# EAGLE board Schema v8 (EAGLE 9.7.0)
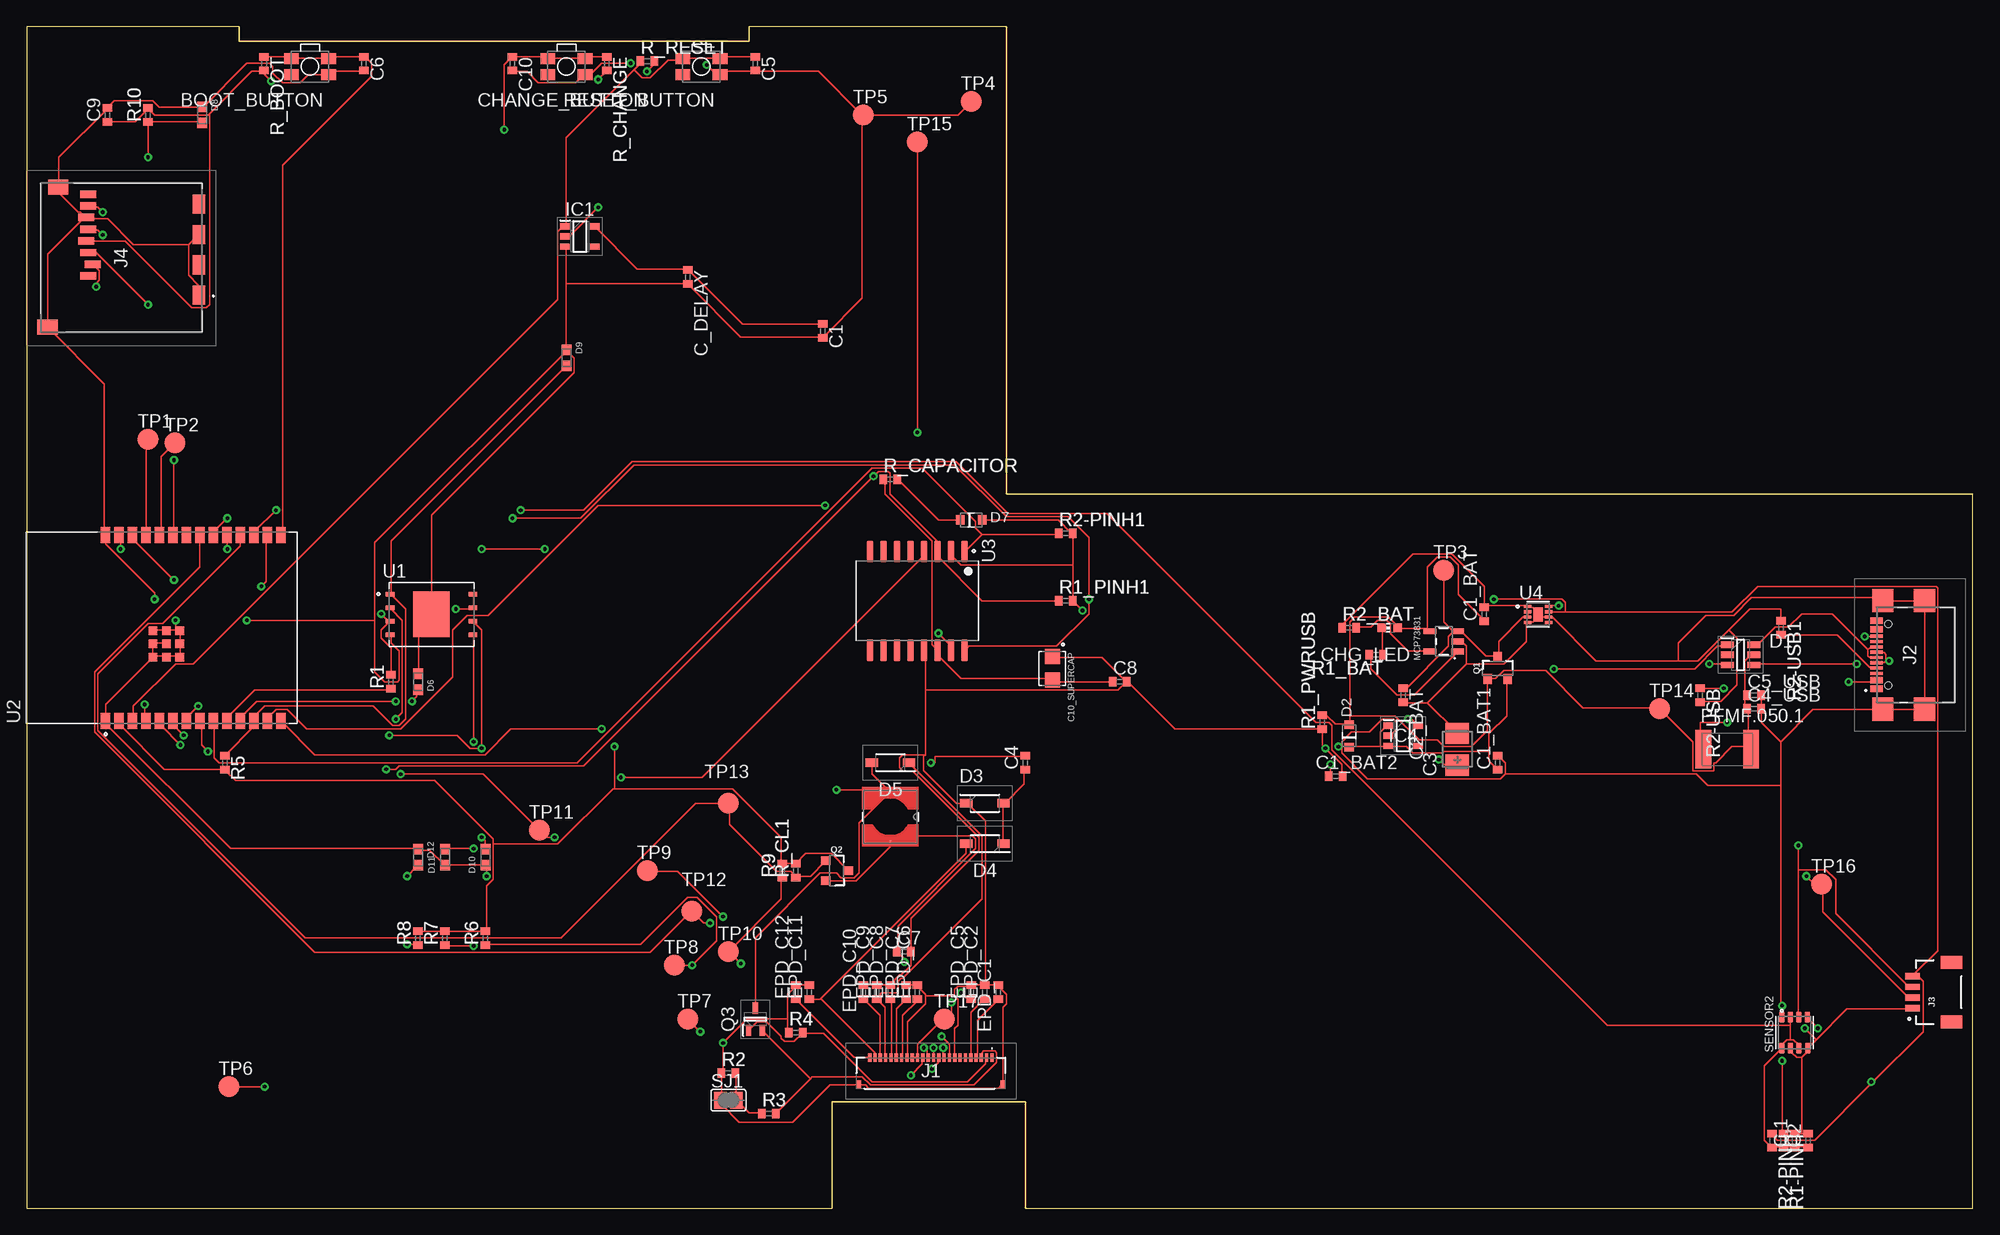
[diagram p0: board, top side]
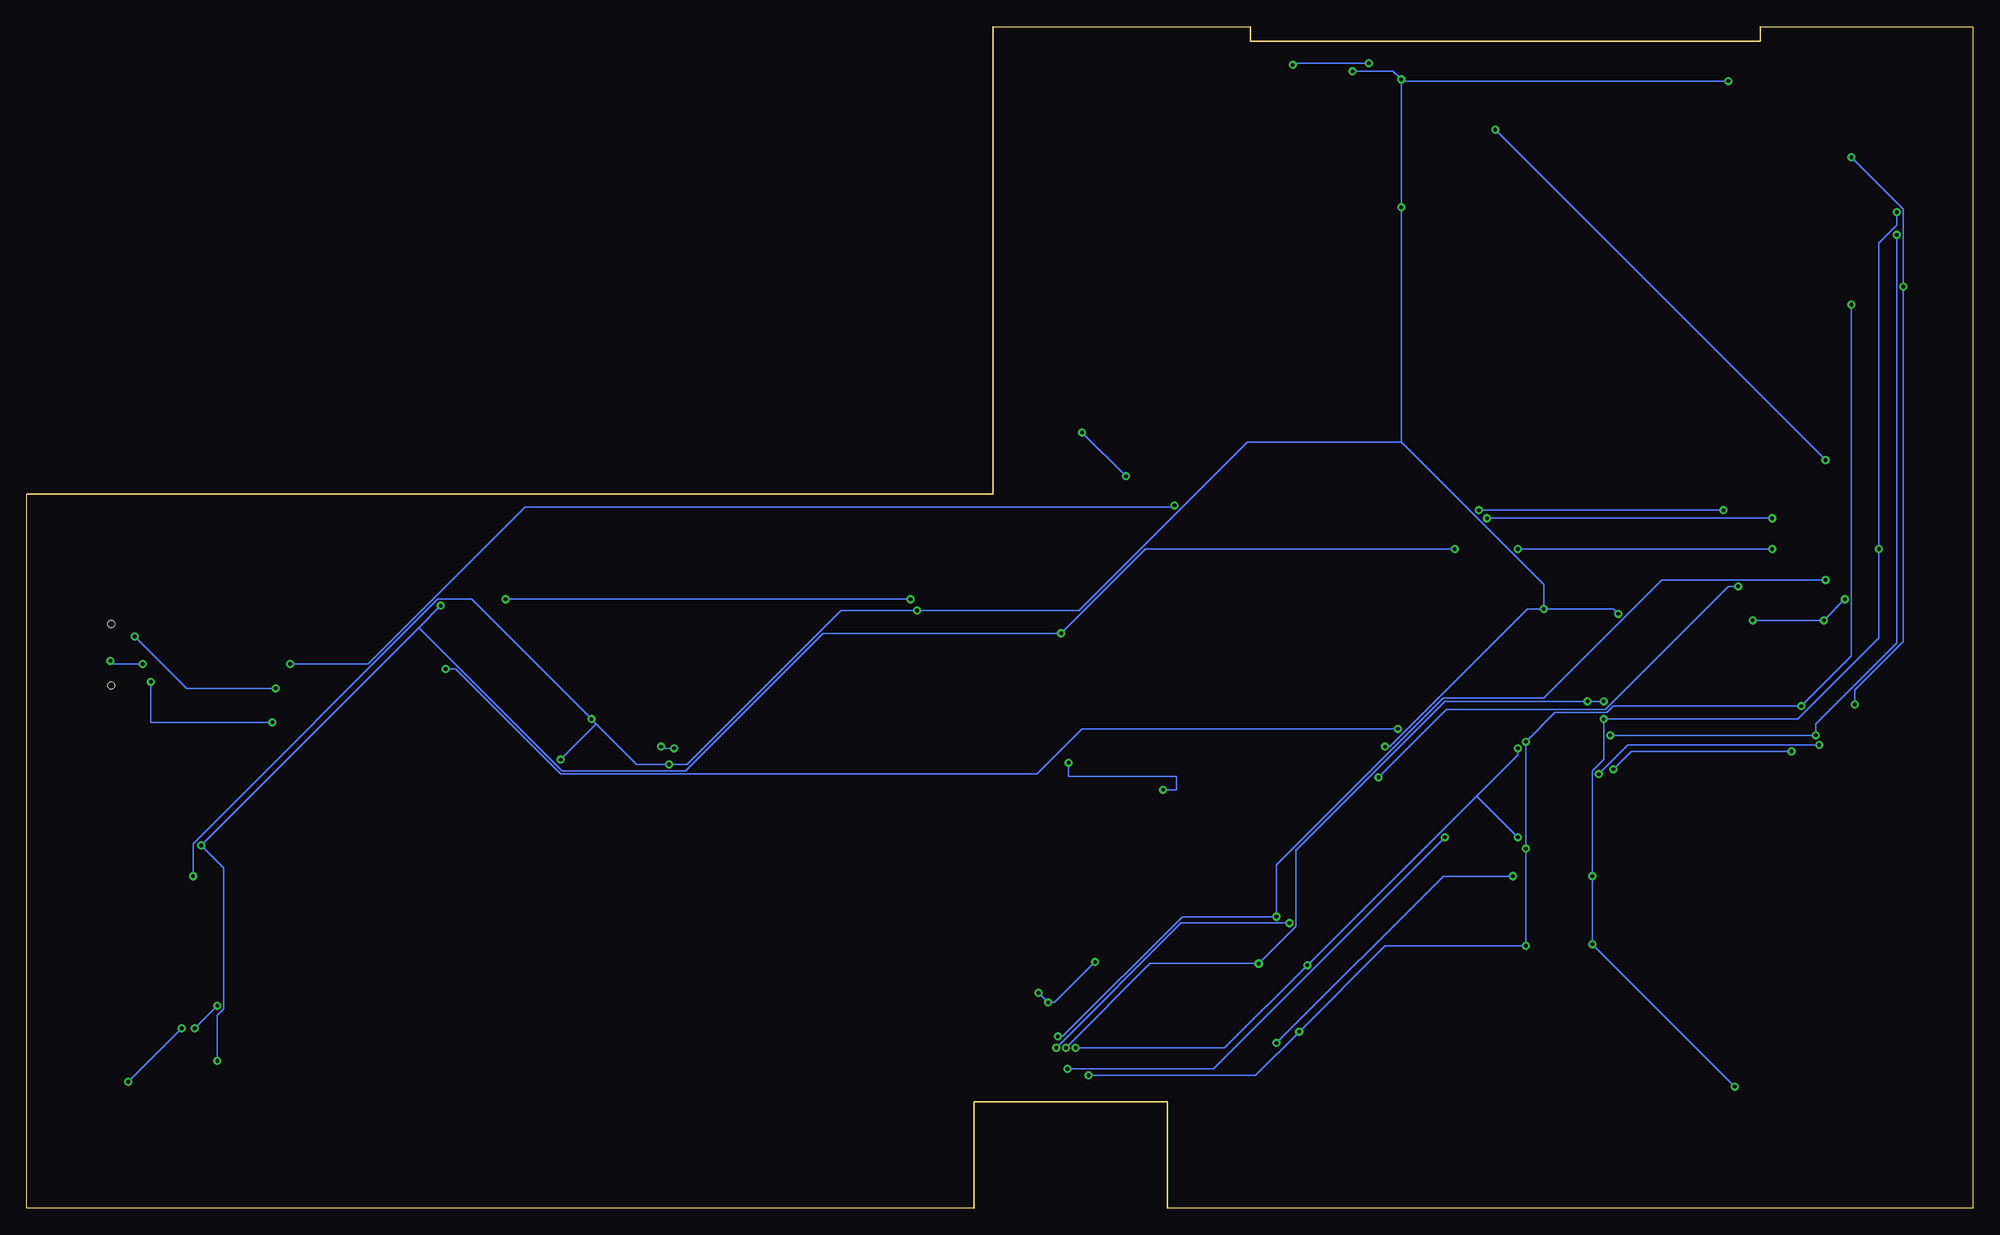
[diagram p1: board, bottom side, seen from below]

Size 183.15 x 111.2 mm. Coordinates in mm from the lower left corner, seen from the top.
Outline: 0,0 75.78,0 75.78,10 93.98,10 93.98,0 183.15,0 183.15,67.2 92.2,67.2 92.2,111.2 68,111.2 68,109.8 20,109.8 20,111.2 0,111.2 0,0
Copper layers (1*16): Top 0.035mm / dielectric 1.5mm / Bottom 0.035mm
Design rules "Fusion Electronics Design Rules": minimum track width 6mil, minimum drill 0.35mm, track to track 6mil, track to pad 6mil, pad to pad 6mil, via to via 6mil, smd to smd 6mil, copper to edge 40mil, drill to drill 6mil, minimum pad ring 10mil, minimum via ring 8mil, stop-mask expansion 4mil, vias tented up to drill 0mil, thermal gap 10mil

## Footprints (pad centres in the part's own frame; a part is rotated, then mirrored left to right if it is on the bottom)
MYBUTTON = smd 1.4 x 1.05: 1 1.75,0.75; 2 -1.75,0.75; 3 -1.75,-0.75; 4 1.75,-0.75
ESP32_WROVER_EAGLE-LTSPICE_C0402 = smd 0.7 x 0.9: 1 -0.65,0; 2 0.65,0
RCL_CT3528 = smd 2 x 2.2: + -1.5,0; - 1.5,0
CAPCP3225X100N = smd 1.4 x 1.4: 1 -1.1,0; 2 1.1,0
ADAFRUIT_CHIP-LED0603 = smd 0.8 x 0.8: A 0,-0.75; C 0,0.75
SOT95P280X145-6N = smd 1.2 x 0.6: 1 -1.25,0.95; 2 -1.25,0; 3 -1.25,-0.95; 4 1.25,-0.95; 5 1.25,0; 6 1.25,0.95
ESP32_WROVER_AVX---SD0805S020S1R0_AVX_SD0805S020S1R0_0 = smd 0.8 x 0.9: 1 -1.05,0; 2 1.05,0
SOD3716X135N = smd 1.15 x 0.8: 1 -1.75,0; 2 1.75,0
DIOC1608X36N = smd 0.97 x 0.94: 1 -0.75,0; 2 0.75,0
SOT95P280X125-5N = smd 0.9 x 0.6: 1 -1.4,0.95; 2 -1.4,0; 3 -1.4,-0.95; 4 1.4,-0.95; 5 1.4,0.95
SOT95P280X120-5N = smd 0.9 x 0.6: 1 -1.4,0.95; 2 -1.4,0; 3 -1.4,-0.95; 4 1.4,-0.95; 5 1.4,0.95
FH34SRJ24S05SH99 = smd 0.3 x 0.8: 1 5.75,1.45; 2 5.25,1.45; 3 4.75,1.45; 4 4.25,1.45; 5 3.75,1.45; 6 3.25,1.45; 7 2.75,1.45; 8 2.25,1.45; 9 1.75,1.45; 10 1.25,1.45; 11 0.75,1.45; 12 0.25,1.45; 13 -0.25,1.45; 14 -0.75,1.45; 15 -1.25,1.45; 16 -1.75,1.45; 17 -2.25,1.45; 18 -2.75,1.45; 19 -3.25,1.45; 20 -3.75,1.45; 21 -4.25,1.45; 22 -4.75,1.45; 23 -5.25,1.45; 24 -5.75,1.45 | smd 0.4 x 0.8: MP1 6.75,-1.05; MP2 -6.75,-1.05
SAMACSYS_PARTS_USB4110GFA = smd 0.3 x 1.15: A1 -3.35,3.678; A4 -2.55,3.678; A5 -1.25,3.678; A6 -0.25,3.678; A7 0.25,3.678; A8 1.25,3.678; A9 2.55,3.678; A12 3.35,3.678; B1 3.05,3.678; B4 2.25,3.678; B5 1.75,3.678; B6 0.75,3.678; B7 -0.75,3.678; B8 -1.75,3.678; B9 -2.25,3.678; B12 -3.05,3.678 | smd 2.18 x 2: MP1 -5.11,-0.827; MP2 5.11,-0.827; MP3 -5.11,3.103; MP4 5.11,3.103 | hole 0.65: -2.89,2.603; 2.89,2.603
JST04_1MM_RA = smd 0.6 x 1.35: 1 -1.5,0; 2 -0.5,0; 3 0.5,0; 4 1.5,0 | smd 1.2 x 2: NC1 2.8,-3.675; NC2 -2.8,-3.675
112ATAARR03ATTEND = smd 1.8 x 1.2: G1 10.6,10.4; G2 4.9,10.4; S1 7.75,10.4; S2 2.05,10.4 | smd 1.4 x 1.9: G3 13.6,-3.85; G4 0.45,-2.85 | smd 0.7 x 1.5: P1 8.8,0; P2 7.7,0.4; P3 6.6,0; P4 5.5,-0.2; P5 4.4,0; P6 3.3,-0.2; P7 2.2,0; P8 1.1,0
IND_4828-WE-TPC_WRE = smd 0.127 x 0.127: 1 -2.286,0; 2 2.286,0
ESP32_WROVER_SPARKFUN-IC-POWER_SOT23-5 = smd 0.55 x 1.2: 1 -0.95,-1.3; 2 0,-1.3; 3 0.95,-1.3; 4 0.95,1.3; 5 -0.95,1.3
ESP32C6_VARISTOR_CT/CN1812 = smd 1.5 x 3.6: 1 -2.25,0; 2 2.25,0
ESP32_WROVER_SPARKFUN-DISCRETESEMI_SOT23-3 = smd 0.8 x 0.9: 1 -0.95,-1; 2 0.95,-1; 3 0,1.1
SOT65P210X110-3N = smd 1.05 x 0.5: 1 -1.05,0.65; 2 -1.05,-0.65; 3 1.05,0
ESP32_WROVER_EAGLE-LTSPICE_R0402 = smd 0.7 x 0.9: 1 -0.65,0; 2 0.65,0
ESP32_WROVER_BME680_PSON80P300X300X100-8N = smd 1.016 x 0.5: 1 1.458,1.2; 2 1.458,0.4; 3 1.458,-0.4; 4 1.458,-1.2; 5 -1.458,-1.22; 6 -1.458,-0.4; 7 -1.458,0.4; 8 -1.458,1.2
SJ = smd 1.168 x 1.6: 1 -0.762,0; 2 0.762,0
TP20R = smd 2 x 2: TP 0,0
SON127P600X800X80-9N = smd 0.94 x 0.44: 1 -3.895,1.905; 2 -3.895,0.635; 3 -3.895,-0.635; 4 -3.895,-1.905; 5 3.895,-1.905; 6 3.895,-0.635; 7 3.895,0.635; 8 3.895,1.905 | smd 3.4 x 4.3: 9 0,0
XCVR_ESP32-C6-WROOM-1-N8 = smd 1.5 x 0.9: 1 -8.75,5.26; 2 -8.75,3.99; 3 -8.75,2.72; 4 -8.75,1.45; 5 -8.75,0.18; 6 -8.75,-1.09; 7 -8.75,-2.36; 8 -8.75,-3.63; 9 -8.75,-4.9; 10 -8.75,-6.17; 11 -8.75,-7.44; 12 -8.75,-8.71; 13 -8.75,-9.98; 14 -8.75,-11.25; 15 8.75,-11.25; 16 8.75,-9.98; 17 8.75,-8.71; 18 8.75,-7.44; 19 8.75,-6.17; 20 8.75,-4.9; 21 8.75,-3.63; 22 8.75,-2.36; 23 8.75,-1.09; 24 8.75,0.18; 25 8.75,1.45; 26 8.75,2.72; 27 8.75,3.99; 28 8.75,5.26 | smd 0.8 x 0.8: 29_1 -2.755,0.79; 29_2 -1.505,0.79; 29_3 -0.255,0.79; 29_4 -2.755,-0.46; 29_5 -1.505,-0.46; 29_6 -0.255,-0.46; 29_7 -2.755,-1.71; 29_8 -1.505,-1.71; 29_9 -0.255,-1.71
SOIC127P1032X265-16N = smd 2.05 x 0.59: 1 -4.655,4.445; 2 -4.655,3.175; 3 -4.655,1.905; 4 -4.655,0.635; 5 -4.655,-0.635; 6 -4.655,-1.905; 7 -4.655,-3.175; 8 -4.655,-4.445; 9 4.655,-4.445; 10 4.655,-3.175; 11 4.655,-1.905; 12 4.655,-0.635; 13 4.655,0.635; 14 4.655,1.905; 15 4.655,3.175; 16 4.655,4.445
SON50P200X200X80-9N = smd 0.76 x 0.27: 1 -0.985,0.75; 2 -0.985,0.25; 3 -0.985,-0.25; 4 -0.985,-0.75; 5 0.985,-0.75; 6 0.985,-0.25; 7 0.985,0.25; 8 0.985,0.75 | smd 0.9 x 1.3: 9 0,0

## Placement (x,y rotation side)
BOOT_BUTTON  BUTTON_CUSYOMV1  [MYBUTTON]  26.67,107.43 180 top
C1  [ESP32_WROVER_EAGLE-LTSPICE_C0402]  74.93,82.55 270 top
C1_BAT  4.7uF  [ESP32_WROVER_EAGLE-LTSPICE_C0402]  137.16,55.88 90 top
C1_BAT1  4.7uF  [ESP32_WROVER_EAGLE-LTSPICE_C0402]  138.43,41.91 90 top
C1_BAT2  4.7uF  [ESP32_WROVER_EAGLE-LTSPICE_C0402]  123.19,40.64 0 top
C2  100nF  [ESP32_WROVER_EAGLE-LTSPICE_C0402]  167.64,6.35 90 top
C2_BAT  4.7uF  [ESP32_WROVER_EAGLE-LTSPICE_C0402]  129.54,48.26 270 top
C3  100uF TANT  [RCL_CT3528]  134.62,43.18 90 top
C4  4.7uF/25V  [ESP32_WROVER_EAGLE-LTSPICE_C0402]  93.98,41.91 90 top
C4_USB  100nF  [ESP32_WROVER_EAGLE-LTSPICE_C0402]  162.56,46.99 0 top
C5  1uF  [ESP32_WROVER_EAGLE-LTSPICE_C0402]  68.58,107.71 270 top
C5_USB  4.7uF  [ESP32_WROVER_EAGLE-LTSPICE_C0402]  162.56,48.26 0 top
C6  100nF  [ESP32_WROVER_EAGLE-LTSPICE_C0402]  31.75,107.71 270 top
C7  10uF  [ESP32_WROVER_EAGLE-LTSPICE_C0402]  82.55,24.13 0 top
C8  100nF  [ESP32_WROVER_EAGLE-LTSPICE_C0402]  102.87,49.53 0 top
C9  100nF  [ESP32_WROVER_EAGLE-LTSPICE_C0402]  7.62,102.87 90 top
C10  100nF  [ESP32_WROVER_EAGLE-LTSPICE_C0402]  45.72,107.71 270 top
C10_SUPERCAP  CPH3225A  [CAPCP3225X100N]  96.52,50.8 270 top
C.1  100nF  [ESP32_WROVER_EAGLE-LTSPICE_C0402]  166.37,6.35 90 top
C_DELAY  100nF  [ESP32_WROVER_EAGLE-LTSPICE_C0402]  62.23,87.63 270 top
CHANGE_BUTTON  BUTTON_CUSYOMV1  [MYBUTTON]  50.8,107.43 180 top
CHG_LED  [ADAFRUIT_CHIP-LED0603]  128.27,54.61 90 top
D1  USBLC6-2SC6Y  [SOT95P280X145-6N]  161.29,52.07 0 top
D2  ESP32_WROVER_AVX---SD0805S020S1R0_AVX_SD0805S020S1R0_0_0AVX_SD0805S020S1R0_0_0  [ESP32_WROVER_AVX---SD0805S020S1R0_AVX_SD0805S020S1R0_0]  124.46,44.45 90 top
D3  MBR0530  [SOD3716X135N]  90.17,38.1 0 top
D4  MBR0530  [SOD3716X135N]  90.17,34.29 180 top
D5  MBR0530  [SOD3716X135N]  81.28,41.91 180 top
D6  PGB1010603MR  [DIOC1608X36N]  36.83,49.53 270 top
D7  ESP32_WROVER_AVX---SD0805S020S1R0_AVX_SD0805S020S1R0_0_0AVX_SD0805S020S1R0_0_0  [ESP32_WROVER_AVX---SD0805S020S1R0_AVX_SD0805S020S1R0_0]  88.9,64.77 0 top
D8  PGB1010603MR  [DIOC1608X36N]  16.51,102.87 270 top
D9  PGB1010603MR  [DIOC1608X36N]  50.8,80.01 270 top
D10  PGB1010603MR  [DIOC1608X36N]  43.18,33.02 90 top
D11  PGB1010603MR  [DIOC1608X36N]  39.37,33.02 90 top
D12  PGB1010603MR  [DIOC1608X36N]  36.83,33.02 270 top
EPD_C1  1uF/50V  [ESP32_WROVER_EAGLE-LTSPICE_C0402]  91.44,20.32 90 top
EPD_C2  1uF/50V  [ESP32_WROVER_EAGLE-LTSPICE_C0402]  90.17,20.32 90 top
EPD_C5  0.1uF/50V  [ESP32_WROVER_EAGLE-LTSPICE_C0402]  88.9,20.32 90 top
EPD_C6  1uF/50V  [ESP32_WROVER_EAGLE-LTSPICE_C0402]  83.82,20.32 90 top
EPD_C7  1uF/50V  [ESP32_WROVER_EAGLE-LTSPICE_C0402]  82.77,20.32 90 top
EPD_C8  1uF/50V  [ESP32_WROVER_EAGLE-LTSPICE_C0402]  81.28,20.32 90 top
EPD_C9  1uF/50V  [ESP32_WROVER_EAGLE-LTSPICE_C0402]  80.01,20.32 90 top
EPD_C10  1uF/50V  [ESP32_WROVER_EAGLE-LTSPICE_C0402]  78.74,20.32 90 top
EPD_C11  1uF/50V  [ESP32_WROVER_EAGLE-LTSPICE_C0402]  73.66,20.32 90 top
EPD_C12  1uF/50V  [ESP32_WROVER_EAGLE-LTSPICE_C0402]  72.39,20.32 90 top
IC1  BD5229G-TR  [SOT95P280X125-5N]  52.07,91.44 0 top
IC4  XC6220A331MR-G  [SOT95P280X120-5N]  129.54,44.45 0 top
J1  FH34SRJ-24S-0.5SH_99_  [FH34SRJ24S05SH99]  85.09,12.7 0 top
J2  SAMACSYS_PARTS_USB4110-GF-A  [SAMACSYS_PARTS_USB4110GFA]  177.77,52.07 90 top
J3  QWIIC_RIGHT_ANGLE  [JST04_1MM_RA]  177.46,20.32 90 top
J4  112A-TAAR-R03_ATTEND  [112ATAARR03ATTEND]  5.82,96.52 270 top
L1  744043680IND_4828-WE-TPC_WRE  [IND_4828-WE-TPC_WRE]  81.28,36.83 270 top
MCP73831  ESP32_WROVER_SPARKFUN-IC-POWER_MCP73831  [ESP32_WROVER_SPARKFUN-IC-POWER_SOT23-5]  133.35,53.34 90 top
PFMF.050.1  ESP32C6_VARISTORCN1812  [ESP32C6_VARISTOR_CT/CN1812]  160.02,43.18 0 top
Q1  20V/4.2A/52mΩ/1.4W  [ESP32_WROVER_SPARKFUN-DISCRETESEMI_SOT23-3]  138.43,50.8 0 top
Q2  20V/4.2A/52mΩ/1.4W  [ESP32_WROVER_SPARKFUN-DISCRETESEMI_SOT23-3]  76.2,31.75 270 top
Q3  SI1308EDL-T1-GE3  [SOT65P210X110-3N]  68.58,17.78 90 top
R1  10K  [ESP32_WROVER_EAGLE-LTSPICE_R0402]  34.29,49.53 90 top
R1-PINH  10K  [ESP32_WROVER_EAGLE-LTSPICE_R0402]  165.32,6.35 270 top
R1_BAT  200  [ESP32_WROVER_EAGLE-LTSPICE_R0402]  127,52.07 180 top
R1_PINH1  10K  [ESP32_WROVER_EAGLE-LTSPICE_R0402]  97.79,57.15 0 top
R1_PWRUSB  100K  [ESP32_WROVER_EAGLE-LTSPICE_R0402]  121.92,45.72 90 top
R2  2.2  [ESP32_WROVER_EAGLE-LTSPICE_R0402]  66.04,12.7 0 top
R2-PINH  10K  [ESP32_WROVER_EAGLE-LTSPICE_R0402]  164.27,6.35 270 top
R2-PINH1  10K  [ESP32_WROVER_EAGLE-LTSPICE_R0402]  97.79,63.5 0 top
R2-USB  5k1  [ESP32_WROVER_EAGLE-LTSPICE_R0402]  157.48,48.26 270 top
R2-USB1  5k1  [ESP32_WROVER_EAGLE-LTSPICE_R0402]  165.1,54.61 270 top
R2_BAT  2K  [ESP32_WROVER_EAGLE-LTSPICE_R0402]  124.46,54.61 0 top
R3  [ESP32_WROVER_EAGLE-LTSPICE_R0402]  69.85,8.89 0 top
R4  10K  [ESP32_WROVER_EAGLE-LTSPICE_R0402]  72.39,16.51 0 top
R5  10K  [ESP32_WROVER_EAGLE-LTSPICE_R0402]  18.66,41.91 270 top
R6  10K  [ESP32_WROVER_EAGLE-LTSPICE_R0402]  43.18,25.4 90 top
R7  10K  [ESP32_WROVER_EAGLE-LTSPICE_R0402]  39.37,25.4 90 top
R8  10K  [ESP32_WROVER_EAGLE-LTSPICE_R0402]  36.83,25.4 90 top
R9  10K  [ESP32_WROVER_EAGLE-LTSPICE_R0402]  71.12,31.75 90 top
R10  10K  [ESP32_WROVER_EAGLE-LTSPICE_R0402]  11.43,102.87 90 top
R_BOOT  10K  [ESP32_WROVER_EAGLE-LTSPICE_R0402]  22.35,107.71 270 top
R_CAPACITOR  15  [ESP32_WROVER_EAGLE-LTSPICE_R0402]  81.28,68.58 0 top
R_CHANGE  10K  [ESP32_WROVER_EAGLE-LTSPICE_R0402]  54.61,107.71 270 top
R_CL1  10K  [ESP32_WROVER_EAGLE-LTSPICE_R0402]  72.39,31.75 90 top
R_RESET  10K  [ESP32_WROVER_EAGLE-LTSPICE_R0402]  58.42,107.95 0 top
RESET_BUTTON  BUTTON_CUSYOMV1  [MYBUTTON]  63.5,107.43 180 top
SENSOR2  ESP32_WROVER_BME680_BME680  [ESP32_WROVER_BME680_PSON80P300X300X100-8N]  166.37,16.51 90 top
SJ1  [SJ]  66.04,10.16 0 top
TP1  TPTP20R  [TP20R]  11.43,72.35 0 top
TP2  TPTP20R  [TP20R]  13.97,72 0 top
TP3  TPTP20R  [TP20R]  133.35,60.03 0 top
TP4  TPTP20R  [TP20R]  88.9,104.14 0 top
TP5  TPTP20R  [TP20R]  78.74,102.87 0 top
TP6  TPTP20R  [TP20R]  19.05,11.43 0 top
TP7  TPTP20R  [TP20R]  62.23,17.78 0 top
TP8  TPTP20R  [TP20R]  60.96,22.86 0 top
TP9  TPTP20R  [TP20R]  58.42,31.75 0 top
TP10  TPTP20R  [TP20R]  66.04,24.13 0 top
TP11  TPTP20R  [TP20R]  48.26,35.56 0 top
TP12  TPTP20R  [TP20R]  62.62,27.94 0 top
TP13  TPTP20R  [TP20R]  66.04,38.1 0 top
TP14  TPTP20R  [TP20R]  153.67,46.99 0 top
TP15  TPTP20R  [TP20R]  83.82,100.33 0 top
TP16  TPTP20R  [TP20R]  168.91,30.48 0 top
TP17  TPTP20R  [TP20R]  86.36,17.78 0 top
U1  W25Q512JVEIQ  [SON127P600X800X80-9N]  38.1,55.88 0 top
U2  ESP32-C6-WROOM-1-N8  [XCVR_ESP32-C6-WROOM-1-N8]  12.7,54.61 90 top
U3  DS3231SN#  [SOIC127P1032X265-16N]  83.82,57.15 270 top
U4  MAX17048G+T10  [SON50P200X200X80-9N]  142.24,55.88 0 top

## Library data of the parts
BOOT_BUTTON CHANGE_BUTTON CHG_LED PFMF.050.1 RESET_BUTTON SJ1 TP1-TP17 = DeskAssistant v19 v1
C1 C1_BAT C1_BAT1 C1_BAT2 C2 C2_BAT C4 C4_USB C5 C5_USB C6-C10 C.1 C_DELAY EPD_C1 EPD_C2 EPD_C5-EPD_C12 = DeskAssistant v19 v1; SPICEMODEL: NONE; SPICEPREFIX: C
C3 = DeskAssistant v19 v1; SPICEPREFIX: C
C10_SUPERCAP = DeskAssistant v19 v1; AVAILABILITY: Not in stock; CHECK_PRICES: https://www.snapeda.com/parts/CPH3225A/Seiko+Instruments/view-part/?ref=eda; DESCRIPTION: 11 mF (EDLC) Supercapacitor 3.3 V 1210 (3225 Metric) - -; MF: Seiko Instruments; MP: CPH3225A; PACKAGE: 1210 Seiko; PRICE: None; PURCHASE-URL: https://www.snapeda.com/api/url_track_click_mouser/?unipart_id=562593&manufacturer=Seiko Instruments&part_name=CPH3225A&search_term=None; SNAPEDA_LINK: https://www.snapeda.com/parts/CPH3225A/Seiko+Instruments/view-part/?ref=snap
D1 = DeskAssistant v19 v1; AVAILABILITY: In Stock; CHECK_PRICES: https://www.snapeda.com/parts/USBLC6-2SC6Y/STMicroelectronics/view-part/?ref=eda; DESCRIPTION: 17V Clamp 5A (8/20µs) Ipp Tvs Diode Surface Mount SOT-23-6; MF: STMicroelectronics; MP: USBLC6-2SC6Y; PACKAGE: SOT-23-6 STMicroelectronics; PRICE: None; SNAPEDA_LINK: https://www.snapeda.com/parts/USBLC6-2SC6Y/STMicroelectronics/view-part/?ref=snap
D2 D7 = DeskAssistant v19 v1; CENTROID_NOT_SPECIFIED: No; DATASHEET: http://datasheets.avx.com/schottky.pdf; DIGIKEY_DESCRIPTION: DIODE SCHOTTKY 20V 1A 0805; DIGIKEY_PART_NUMBER: 478-7800-1-ND; LEAD_FREE: yes; MF: AVX; MOUSER_PART_NUMBER: 581-SD0805S020S1R0; PACKAGE: 0805 (2012 metric); PREFIX: D; ROHS: yes; TEMPERATURE_RANGE_HIGH: +125°C; TEMPERATURE_RANGE_LOW: -55°C
D3-D5 = DeskAssistant v19 v1; AVAILABILITY: In Stock; CHECK_PRICES: https://www.snapeda.com/parts/MBR0530/Onsemi/view-part/?ref=eda; DESCRIPTION: Diode Schottky 30 V 500mA Surface Mount SOD-123; MF: ON Semiconductor; MP: MBR0530; PACKAGE: SOD-123-2 ON Semiconductor; PRICE: None; PURCHASE-URL: https://www.snapeda.com/api/url_track_click_mouser/?unipart_id=179458&manufacturer=ON Semiconductor&part_name=MBR0530&search_term=None; SNAPEDA_LINK: https://www.snapeda.com/parts/MBR0530/Onsemi/view-part/?ref=snap
D6 D8-D12 = DeskAssistant v19 v1; AVAILABILITY: In Stock; CHECK_PRICES: https://www.snapeda.com/parts/PGB1010603MR/Littelfuse/view-part/?ref=eda; DESCRIPTION: 150V (Typ) Clamp - Ipp Tvs Diode Surface Mount 0603 (1608 Metric); MF: Littelfuse Inc.; MP: PGB1010603MR; PACKAGE: 0603 Littelfuse Inc.; PRICE: None; PURCHASE-URL: https://www.snapeda.com/api/url_track_click_mouser/?unipart_id=5659453&manufacturer=Littelfuse Inc.&part_name=PGB1010603MR&search_term=None; SNAPEDA_LINK: https://www.snapeda.com/parts/PGB1010603MR/Littelfuse/view-part/?ref=snap
IC1 = DeskAssistant v19 v1; DESCRIPTION: Voltage Detector with Adjustable Delay Time: CMOS processes are utilized to develop high precision, low current consumption CMOS reset ICs that allow arbitrary setting of the delay time. The extensive lineup includes both Nch Open Drain and CMOS output types in a wide range of detection voltages (from 2.3V to 6.0V, in 0.1V steps), enabling selection of the ideal solution based on customer requirements. In addition, the entire series is of course both lead-free and RoHS-compliant.; HEIGHT: 1.25mm; MANUFACTURER_NAME: ROHM Semiconductor; MANUFACTURER_PART_NUMBER: BD5229G-TR; MOUSER_PART_NUMBER: 755-BD5229G-TR; MOUSER_PRICE-STOCK: https://www.mouser.co.uk/ProductDetail/ROHM-Semiconductor/BD5229G-TR?qs=4kLU8WoGk0vvnhrrYwdszw%3D%3D
IC4 = DeskAssistant v19 v1; DESCRIPTION: LDO Voltage Regulators; HEIGHT: 1.2mm; MANUFACTURER_NAME: Torex; MANUFACTURER_PART_NUMBER: XC6220A331MR-G; MOUSER_PART_NUMBER: 865-XC6220A331MR-G; MOUSER_PRICE-STOCK: https://www.mouser.co.uk/ProductDetail/Torex-Semiconductor/XC6220A331MR-G?qs=AsjdqWjXhJ8ZSWznL1J0gg%3D%3D
J1 = DeskAssistant v19 v1; DESCRIPTION: 24 Position FFC, FPC Connector Contacts, Top and Bottom 0.020" (0.50mm) Surface Mount, Right Angle; HEIGHT: 1.1mm; MANUFACTURER_NAME: Hirose; MANUFACTURER_PART_NUMBER: FH34SRJ-24S-0.5SH(99); MOUSER_PART_NUMBER: 798-FH34SRJ24S05SH99; MOUSER_PRICE-STOCK: https://www.mouser.co.uk/ProductDetail/Hirose-Connector/FH34SRJ-24S-0.5SH99?qs=vcbW%252B4%252BSTIpKBl5ap9J8Fw%3D%3D
J2 = DeskAssistant v19 v1; DESCRIPTION: CONN USB 2.0 TYPE-C R/A SMT; HEIGHT: 3.26mm; MANUFACTURER_NAME: GCT (GLOBAL CONNECTOR TECHNOLOGY); MANUFACTURER_PART_NUMBER: USB4110-GF-A; MOUSER_PART_NUMBER: 640-USB4110-GF-A; MOUSER_PRICE-STOCK: https://www.mouser.co.uk/ProductDetail/GCT/USB4110-GF-A?qs=KUoIvG%2F9IlYiZvIXQjyJeA%3D%3D
J3 = DeskAssistant v19 v1; PROD_ID: CONN-13694
J4 = DeskAssistant v19 v1; DESCRIPTION: Micro SD Card Socket, Push-Push Type, Top Mount, SMT, H=1.83mm, 10u; HEIGHT: 1.9mm; MANUFACTURER_NAME: ATTEND; MANUFACTURER_PART_NUMBER: 112A-TAAR-R03 ATTEND
L1 = DeskAssistant v19 v1; COPYRIGHT: Copyright (C) 2024 Ultra Librarian. All rights reserved.; MANUFACTURER_PART_NUMBER: 744043680; MFR_NAME: Wurth Electronics
MCP73831 = DeskAssistant v19 v1; PROD_ID: IC-09995
Q1 Q2 = DeskAssistant v19 v1; PROD_ID: TRAN-14388
Q3 = DeskAssistant v19 v1; AVAILABILITY: In Stock; CHECK_PRICES: https://www.snapeda.com/parts/SI1308EDL-T1-GE3/Vishay+Siliconix/view-part/?ref=eda; DESCRIPTION: Si1308EDL-T1-GE3 N-channel MOSFET Transistor, 1.5 A, 30 V, 3-Pin SC-70 | Siliconix / Vishay SI1308EDL-T1-GE3; MF: Vishay Siliconix; MP: SI1308EDL-T1-GE3; PACKAGE: SOT-323 Vishay Semiconductor; PRICE: None; PURCHASE-URL: https://www.snapeda.com/api/url_track_click_mouser/?unipart_id=274603&manufacturer=Vishay Siliconix&part_name=SI1308EDL-T1-GE3&search_term=None; SNAPEDA_LINK: https://www.snapeda.com/parts/SI1308EDL-T1-GE3/Vishay+Siliconix/view-part/?ref=snap
R1 R1-PINH R1_BAT R1_PINH1 R1_PWRUSB R2 R2-PINH R2-PINH1 R2-USB R2-USB1 R2_BAT R3-R10 R_BOOT R_CAPACITOR R_CHANGE R_CL1 R_RESET = DeskAssistant v19 v1; SPICEMODEL: NONE; SPICEPREFIX: R
SENSOR2 = DeskAssistant v19 v1; AVAILABILITY: Unavailable; DESCRIPTION: Integrated Environmental Unit; MF: Bosch Sensortec; MP: BME680; PACKAGE: LGA-8 Bosch Tools; PRICE: None
U1 = DeskAssistant v19 v1; AVAILABILITY: In Stock; CHECK_PRICES: https://www.snapeda.com/parts/W25Q512JVEIQ/Winbond+Electronics/view-part/?ref=eda; DESCRIPTION: FLASH - NOR Memory IC 512Mb (64M x 8) SPI - Quad I/O 133 MHz 8-WSON (8x6); MF: Winbond Electronics; MP: W25Q512JVEIQ; PACKAGE: Package; PRICE: None; SNAPEDA_LINK: https://www.snapeda.com/parts/W25Q512JVEIQ/Winbond+Electronics/view-part/?ref=snap
U2 = DeskAssistant v19 v1; AVAILABILITY: In Stock; CHECK_PRICES: https://www.snapeda.com/parts/ESP32-C6-WROOM-1-N8/Espressif+Systems/view-part/?ref=eda; DESCRIPTION: Multiprotocol Modules ESP32-C6 module, Wi-Fi 6 in 2.4 GHz band, Bluetooth 5, Zigbee 3.0 and Thread. ESP34-WROOM Compatible - ENGINEERING SAMPLE; MF: Espressif Systems; MP: ESP32-C6-WROOM-1-N8; PACKAGE: None; PRICE: None; SNAPEDA_LINK: https://www.snapeda.com/parts/ESP32-C6-WROOM-1-N8/Espressif+Systems/view-part/?ref=snap
U3 = DeskAssistant v19 v1; AVAILABILITY: In Stock; CHECK_PRICES: https://www.snapeda.com/parts/DS3231SN%23/Analog+Devices/view-part/?ref=eda; DESCRIPTION: Extremely Accurate I²C-Integrated RTC/TCXO/Crystal; MF: Analog Devices; MP: DS3231SN#; PACKAGE: SOIC-16 Maxim; PRICE: None; PURCHASE-URL: https://www.snapeda.com/api/url_track_click_mouser/?unipart_id=99048&manufacturer=Analog Devices&part_name=DS3231SN#&search_term=None; SNAPEDA_LINK: https://www.snapeda.com/parts/DS3231SN%23/Analog+Devices/view-part/?ref=snap
U4 = DeskAssistant v19 v1; AVAILABILITY: In Stock; CHECK_PRICES: https://www.snapeda.com/parts/MAX17048G+T10/Analog+Devices/view-part/?ref=eda; DESCRIPTION: 3µA 1-Cell/2-Cell Fuel Gauge with ModelGauge; MF: Analog Devices; MP: MAX17048G+T10; PACKAGE: TDFN-8 Maxim; PRICE: None; PURCHASE-URL: https://www.snapeda.com/api/url_track_click_mouser/?unipart_id=329239&manufacturer=Analog Devices&part_name=MAX17048G+T10&search_term=None; SNAPEDA_LINK: https://www.snapeda.com/parts/MAX17048G+T10/Analog+Devices/view-part/?ref=snap

## Nets
3V3: C1_BAT2.1 C3.+ C9.1 D7.2 IC1.2 IC4.5 J3.2 J4.P4 Q2.3 R1.2 R1_PINH1.2 R2-PINH1.2 R5.2 R6.2 R7.2 R8.2 R9.2 R10.2 R_BOOT.2 R_CHANGE.2 R_CL1.2 R_RESET.2 TP16.TP U1.3 U1.7 U1.8 U2.2 U3.2
32KHZ: R2-PINH1.1 U2.9 U3.1
DN: D1.4 J2.A7 J2.B7
DP: D1.6 J2.A6 J2.B6
EPD_3V3: C7.1 EPD_C5.1 J1.15 J1.16 L1.2 Q2.2 TP17.TP
EPD_3V3_C: Q2.1 R_CL1.1 TP13.TP U2.18
EPD_BUSY: J1.9 TP9.TP U2.26
EPD_CS: D6.2 J1.12 R9.1 TP10.TP U2.11
EPD_DC: J1.11 TP11.TP U2.5
EPD_RST: J1.10 TP12.TP U2.21
FLASH_CS: D9.2 R5.1 U1.1 U2.12
GDR: J1.2 Q3.1 R4.2
GND: BOOT_BUTTON.2 C1.2 C1_BAT1.2 C1_BAT2.2 C1_BAT.2 C2.2 C2_BAT.2 C3.- C4_USB.2 C5.2 C5_USB.2 C6.2 C7.2 C8.2 C9.2 C10.2 C10_SUPERCAP.1 C.1.2 C_DELAY.2 CHANGE_BUTTON.2 D3.1 D6.1 D8.1 D9.1 D10.1 D11.1 D12.1 EPD_C1.2 EPD_C2.2 EPD_C5.2 EPD_C6.2 EPD_C7.2 EPD_C8.2 EPD_C9.2 EPD_C10.2 EPD_C11.2 EPD_C12.2 IC1.3 IC4.2 J1.8 J1.17 J1.MP1 J1.MP2 J2.A1 J2.A12 J2.B1 J2.B12 J2.MP1 J2.MP2 J2.MP3 J2.MP4 J3.1 J4.G1 J4.G2 J4.G3 J4.G4 J4.P6 MCP73831.2 R1_PWRUSB.1 R2-USB1.1 R2-USB.2 R2.1 R2_BAT.1 R4.1 RESET_BUTTON.2 SENSOR2.1 SENSOR2.5 SENSOR2.7 SJ1.1 TP4.TP TP5.TP U1.4 U1.9 U2.1 U2.28 U2.29_1 U2.29_2 U2.29_3 U2.29_4 U2.29_5 U2.29_6 U2.29_7 U2.29_8 U2.29_9 U3.13 U4.1 U4.4 U4.6 U4.9
GPIO8: R1.1 U2.10
I2C_PW: C2.1 C.1.1 R1-PINH.2 R2-PINH.2 SENSOR2.2 SENSOR2.6 SENSOR2.8 U2.17
INT_RTC: R1_PINH1.1 TP15.TP U2.8 U3.3
IO/BOOT: BOOT_BUTTON.3 BOOT_BUTTON.4 C6.1 R_BOOT.1 U2.15
IO/CHANGE: C10.1 CHANGE_BUTTON.3 CHANGE_BUTTON.4 R_CHANGE.1 U2.23
MISO: D12.2 J4.P7 R8.1 TP6.TP U1.2 U2.27
MOSI: D11.2 J1.14 J4.P3 R7.1 TP7.TP U1.5 U2.7
N$1: C1.1 C_DELAY.1 IC1.5
N$2: J2.B5 R2-USB.1
N$3: EPD_C2.1 J1.5
N$4: J2.A5 R2-USB1.2
N$5: CHG_LED.C R1_BAT.1
N$6: C1_BAT1.1 D2.1 IC4.1 IC4.3 Q1.2
N$7: C4.1 D3.2 D4.1
N$8: MCP73831.1 R1_BAT.2
N$9: MCP73831.5 R2_BAT.2
N$10: EPD_C1.1 J1.4
N$11: EPD_C6.1 J1.18
N$13: EPD_C7.1 J1.19
N$14: EPD_C8.1 J1.20
N$15: D1.2
N$17: EPD_C10.1 J1.22
N$19: EPD_C12.1 J1.24
N$23: D7.1 R_CAPACITOR.2
PREVGH: D5.1 EPD_C9.1 J1.21
PREVGL: D4.2 EPD_C11.1 J1.23
RESE: J1.3 Q3.2 R3.2
RESE': R2.2 R3.1 SJ1.2
RESET: C5.1 IC1.1 R_RESET.1 RESET_BUTTON.3 RESET_BUTTON.4 U2.3
RTC_RST: U2.16 U3.4
RX: TP2.TP U2.24
SCK: D10.2 J1.13 J4.P5 R6.1 TP8.TP U1.6 U2.6
SCL: J3.4 R2-PINH.1 SENSOR2.4 U2.20 U3.16 U4.7
SDA: J3.3 R1-PINH.1 SENSOR2.3 U2.19 U3.15 U4.8
SRC: C4.2 D5.2 L1.1 Q3.3
SS_SD: D8.2 J4.P2 R10.1 U2.4
TX: TP1.TP U2.25
USB_D+: D1.1 U2.14
USB_D-: D1.3 U2.13
VBAT: C2_BAT.1 MCP73831.3 Q1.3 TP3.TP U4.2 U4.3
VBUS: C1_BAT.1 C4_USB.1 C5_USB.1 CHG_LED.A D1.5 D2.2 MCP73831.4 PFMF.050.1.2 Q1.1 R1_PWRUSB.2 TP14.TP
VRTC: C8.1 C10_SUPERCAP.2 R_CAPACITOR.1 U3.14
VUSB: J2.A4 J2.A9 J2.B4 J2.B9 PFMF.050.1.1

## Tracks (layer width: path | path; a pad name or v marks a point on that pad's centre or on a via)
3V3  (via drill 0.35)
  Top 0.152: J3.2 177.39,19.96 176.94,19.96 169.01,27.89 169.01,30.48 TP16.TP 168.25,30.48 v167.49,31.24 | v122.68,41.76 122.68,40.69 C1_BAT2.1 | v130,46.02 130.3,46.02 130.91,45.41 IC4.5 | v132.89,42.22 133.35,41.76 134.57,41.76 C3.+ | 98.45,60.5 98.45,63.4 R2-PINH1.2 98.3,63.55 97.08,64.77 D7.2 | 98.45,60.5 R1_PINH1.2 | 98.45,60.5 87.94,60.5 87.02,61.42 87.02,61.72 U3.2 | R1_PINH1.2 v99.36,56.24 | R1_PINH1.2 | 72.39,32.46 71.17,32.46 R9.2 71.02,32.46 71.02,34.9 66.45,39.47 55.32,39.47 | 72.39,32.46 73.3,33.38 75.74,33.38 77.27,31.85 Q2.3 | 72.39,32.46 R_CL1.2 | R8.2 36.88,26.06 39.32,26.06 R7.2 39.47,26.06 43.13,26.06 R6.2 43.28,26.06 43.28,30.33 43.89,30.94 43.89,34.29 | U2.2 8.84,45.72 8.84,45.41 12.95,41.3 18.59,41.3 R5.2 18.75,41.15 19.66,40.23 38.41,40.23 43.89,34.75 43.89,34.29 | 55.32,39.47 55.17,39.47 49.99,34.29 43.89,34.29 | 11.43,103.48 10.21,102.26 7.62,102.26 C9.1 | 17.22,103.02 17.07,102.87 12.04,102.87 11.43,103.48 | 17.22,103.02 21.18,106.98 22.25,106.98 R_BOOT.2 22.4,106.98 22.4,106.68 v23.01,106.07 | 11.43,103.48 R10.2 | 17.22,103.02 17.22,85.04 16.92,84.73 15.54,84.73 9.3,90.98 5.64,90.98 J4.P4 | U1.8 42.06,57.76 42.06,56.54 U1.7 41.91,56.39 v40.39,56.39 | R1.2 34.29,52.73 33.38,53.65 33.38,54.41 34.14,55.17 | 34.14,55.17 v33.38,55.93 | 34.14,55.17 U1.3 | IC1.2 51.05,91.44 v53.8,94.18 | v53.8,106.22 54.56,106.98 R_CHANGE.2 | v58.37,106.98 58.98,107.59 58.98,107.9 R_RESET.2 | v55.32,43.43 55.32,39.47
  Bottom 0.152: 129.54,45.57 v130,46.02 141.28,57.3 144.47,57.3 167.49,34.29 v167.49,31.24 | 129.54,45.57 125.73,41.76 v122.68,41.76 121.01,41.76 106.53,56.24 v99.36,56.24 84.12,56.24 68.28,72.08 53.8,72.08 | 129.54,45.57 v132.89,42.22 | v40.39,56.39 33.83,56.39 v33.38,55.93 | 53.8,106.07 v53.8,94.18 53.8,72.08 | v58.37,106.98 54.56,106.98 v53.8,106.22 53.8,106.07 | v40.39,56.39 40.39,58.67 53.8,72.08 | 53.8,106.07 v23.01,106.07 | v55.32,43.43 54.86,43.43 41.91,56.39 v40.39,56.39
32KHZ
  Top 0.152: 89.92,63.4 97.08,63.4 R2-PINH1.1 | 89.92,63.4 88.39,61.87 U3.1 | 89.92,63.4 89.31,64.01 89.31,64.62 84.28,69.65 79.55,69.65 51.82,41.91 18.14,41.91 17.68,42.37 17.68,45.72 U2.9
DN  (via drill 0.35)
  Top 0.152: 174.96,51.51 174.8,51.36 174.19,51.36 J2.B7 | 174.96,51.51 174.96,52.12 174.8,52.27 174.19,52.27 J2.A7 | v172.21,51.21 162.61,51.21 D1.4 | 174.96,51.51 v175.26,51.51
  Bottom 0.152: v172.21,51.21 174.96,51.21 v175.26,51.51
DP
  Top 0.152: 173.28,52.58 173.28,51.97 173.43,51.82 174.04,51.82 J2.A6 | 173.28,52.58 173.43,52.73 174.04,52.73 J2.B6 | 173.28,52.58 169.93,55.93 167.03,55.93 165.78,54.68 164.53,54.68 162.89,53.03 162.61,53.03 D1.6
EPD_3V3  (via drill 0.35)
  Top 0.152: 83.82,14.17 83.36,14.17 J1.16 | v87.94,20.27 88.39,19.81 88.85,19.81 EPD_C5.1 | v87.02,19.36 87.02,18.44 TP17.TP 86.26,17.83 83.82,15.39 83.82,14.17 | 83.82,14.17 J1.15 | 81.23,34.59 81.23,33.98 78.03,30.79 75.29,30.79 Q2.2 | 81.23,34.59 81.69,35.05 89,35.05 89.31,34.75 89.31,33.83 81.99,26.52 81.99,24.23 C7.1 81.99,24.08 82.6,23.47 v82.6,23.16 | 81.23,34.59 L1.2
  Bottom 0.152: v87.94,20.27 v87.02,19.36 86.41,19.36 v82.6,23.16
EPD_3V3_C
  Top 0.152: 72.39,31.24 73.76,31.24 75.13,32.61 Q2.1 | U2.18 20.12,63.25 20.12,62.33 12.8,55.02 11.43,55.02 6.71,50.29 6.71,44.96 26.21,25.45 50.29,25.45 62.94,38.1 TP13.TP 66.14,38.1 66.14,36.12 70.56,31.7 71.93,31.7 72.39,31.24 | 72.39,31.24 R_CL1.1
EPD_BUSY  (via drill 0.35)
  Top 0.152: v86.11,16.15 86.87,15.39 86.87,14.17 J1.9 | v65.53,27.43 61.27,31.7 58.52,31.7 TP9.TP | v13.87,59.13 10.06,62.94 10.06,63.25 U2.26
  Bottom 0.152: v86.11,16.15 85.65,16.15 74.37,27.43 v65.53,27.43 65.53,32.31 49.84,48.01 40.39,48.01 29.26,59.13 v13.87,59.13
EPD_CS  (via drill 0.35)
  Top 0.152: v36.27,47.7 36.73,48.16 36.73,48.77 D6.2 | v34.75,47.7 21.64,47.7 20.27,46.33 20.27,45.87 U2.11 | v85.34,15.09 85.34,14.17 J1.12 | v67.21,23.01 66.14,24.08 TP10.TP 71.02,29.11 71.02,31.09 R9.1
  Bottom 0.152: v34.75,47.7 v36.27,47.7 49.68,47.7 63.7,33.68 63.7,26.52 v67.21,23.01 77.42,23.01 v85.34,15.09
EPD_DC  (via drill 0.35)
  Top 0.152: v85.19,13.11 85.8,13.72 85.8,14.02 J1.11 | v49.68,34.9 48.92,34.9 TP11.TP 42.98,40.84 v35.2,40.84 | v14.48,43.59 12.65,45.41 12.65,45.72 U2.5
  Bottom 0.152: v85.19,13.11 71.48,13.11 v49.68,34.9 | v14.48,43.59 32.46,43.59 v35.2,40.84
EPD_RST  (via drill 0.35)
  Top 0.152: v86.26,15.09 86.26,14.17 J1.10 | v64.31,26.82 63.7,26.82 62.64,27.89 TP12.TP 62.48,27.89 58.67,24.08 27.13,24.08 6.4,44.81 6.4,50.44 16.31,60.35 16.31,63.25 U2.21
  Bottom 0.152: v86.26,15.09 74.52,26.82 v64.31,26.82
FLASH_CS
  Top 0.152: R5.1 18.75,42.67 21.34,45.26 21.34,45.72 U2.12 21.49,45.87 21.49,46.33 22.4,47.24 32.61,47.24 34.44,45.41 35.05,45.41 35.66,46.02 35.66,56.39 34.29,57.76 U1.1 34.29,57.91 34.29,62.79 50.75,79.25 D9.2
GDR
  Top 0.152: J1.2 90.22,14.02 90.22,13.56 88.54,11.89 79.55,11.89 74.98,16.46 73.15,16.46 R4.2 73,16.46 72.24,15.7 71.32,15.7 71.02,16 71.02,16.15 69.65,17.53 68.73,17.53 67.97,16.76 Q3.1
GND  (via drill 0.35)
  Top 0.152: C10.2 45.72,106.98 47.09,106.98 48.16,105.92 51.66,105.92 52.43,106.68 CHANGE_BUTTON.2 52.58,106.83 53.19,106.83 54.1,107.75 v56.84,107.75 | 68.58,106.98 65.53,106.98 65.38,106.83 RESET_BUTTON.2 65.23,106.83 64.77,106.83 v64.01,107.59 | TP4.TP 87.63,102.87 TP5.TP 78.64,102.87 | 68.58,106.98 74.52,106.98 78.64,102.87 | 68.58,106.98 C5.2 | D6.1 36.88,50.29 36.88,54.56 38.1,55.78 U1.9 38.1,65.23 51.51,78.64 51.51,80.01 50.9,80.62 D9.1 | 50.75,87.02 50.75,80.77 D9.1 | 50.75,87.02 50.75,90.37 IC1.3 | 50.75,87.02 62.18,87.02 C_DELAY.2 62.33,86.87 67.21,81.99 74.83,81.99 C1.2 74.98,81.99 78.64,85.65 78.64,102.87 | 32.77,55.32 32.77,62.64 50.75,80.62 D9.1 | 32.77,55.32 32.77,50.44 33.68,49.53 34.9,49.53 35.05,49.68 35.05,52.43 34.29,53.19 34.29,53.95 U1.4 | U2.29_3 12.04,54.41 13.11,54.41 U2.29_6 13.26,54.41 14.02,54.41 | 14.02,54.41 14.33,54.41 U2.29_9 | U2.29_1 11.89,51.97 11.89,53.03 U2.29_2 12.04,53.19 13.11,53.19 U2.29_5 | U2.29_1 12.04,51.97 13.11,51.97 U2.29_4 13.26,51.97 14.33,51.97 U2.29_7 14.48,51.97 14.48,53.03 U2.29_8 14.48,53.19 14.48,54.25 U2.29_9 | U2.29_1 11.89,51.82 7.47,47.4 7.47,45.87 U2.1 7.32,45.72 19.2,33.83 36.73,33.83 D12.1 36.88,33.68 37.95,33.68 39.32,32.31 D11.1 39.47,32.31 43.13,32.31 D10.1 43.28,32.16 v43.28,31.24 | 15.24,90.68 15.24,87.78 16.15,86.87 16.15,85.95 J4.G1 | 15.24,90.68 16.15,91.59 J4.G2 | C6.2 31.7,106.98 28.65,106.98 28.5,106.83 BOOT_BUTTON.2 28.35,106.68 26.52,106.68 25.76,105.92 24.08,105.92 23.16,106.83 23.16,107.44 22.86,107.75 20.73,107.75 16.61,103.63 D8.1 16.46,103.63 12.5,103.63 11.89,104.24 8.23,104.24 7.62,103.63 C9.2 7.62,103.48 3.05,98.91 3.05,96.16 J4.G4 3.05,96.01 3.05,95.56 4.88,93.73 5.03,93.73 5.49,93.27
  Top 0.152: 15.24,90.68 10.06,90.68 7.62,93.12 5.64,93.12 J4.P6 5.49,93.27 | 5.49,93.27 1.98,89.76 1.98,83.06 J4.G3 1.98,82.91 7.32,77.57 7.32,63.4 U2.28 7.47,63.25 7.47,62.48 12.04,57.91 v12.04,57.3 | v14.02,55.32 14.02,54.41 | 14.02,54.41 U2.29_9 | v20.73,55.32 32.77,55.32 | C1_BAT2.2 123.75,40.69 123.75,41.76 v122.22,43.28 121.92,43.59 R1_PWRUSB.1 121.92,45.11 108.05,45.11 103.63,49.53 C8.2 103.48,49.53 | 103.48,49.53 101.19,51.82 96.62,51.82 C10_SUPERCAP.1 | 71.63,17.83 71.63,20.12 72.39,20.88 EPD_C12.2 72.39,21.03 73.61,21.03 EPD_C11.2 | 71.63,17.83 71.63,16.61 R4.1 | 71.63,17.83 67.82,17.83 v65.53,15.54 65.53,12.8 R2.1 65.38,12.65 65.38,10.21 SJ1.1 65.38,10.06 65.38,9.75 67.06,8.08 72.08,8.08 75.59,11.58 78.33,11.58 J1.MP2 78.49,11.58 78.94,11.58 79.25,11.28 91.44,11.28 91.75,11.58 J1.MP1 91.9,11.73 91.9,18.9 92.2,19.2 92.2,20.12 91.44,20.88 EPD_C1.2 91.44,21.03 90.22,21.03 | 84.58,19.96 84.58,20.12 83.82,20.88 EPD_C6.2 83.82,21.03 82.91,21.03 EPD_C7.2 | 84.58,19.96 84.58,19.2 82.91,17.53 82.91,14.17 J1.17 | 87.33,19.96 87.63,19.66 87.63,17.22 87.33,16.92 87.33,14.17 J1.8 | 87.33,19.96 87.33,20.57 87.63,20.88 88.85,20.88 EPD_C5.2 89,21.03 90.07,21.03 EPD_C2.2 90.22,21.03 | 87.33,19.96 84.58,19.96 | 80.01,21.03 78.79,21.03 EPD_C10.2 | 80.01,21.03 81.23,21.03 | 80.01,21.03 EPD_C9.2 | 81.23,21.03 82.14,21.95 82.3,21.95 83.21,22.86 83.21,24.08 C7.2 83.21,24.23 83.21,27.28 89.61,33.68 89.61,34.9 83.36,41.15 82.45,41.15 82.14,41.45 82.14,42.37 82.45,42.67 84.58,42.67 | 81.23,21.03 EPD_C8.2 | 84.58,48.77 84.58,52.43 U3.13 | 84.58,48.77 84.58,42.67 | 90.22,21.03 90.22,36.42 88.54,38.1 D3.1 87.48,38.1 84.38,41.2 84.38,42.62 84.58,42.62 84.58,42.67
  Top 0.152: 103.48,49.53 102.72,48.77 84.58,48.77 | 131.83,47.55 129.54,47.55 C2_BAT.2 | 131.83,47.55 134.57,44.81 C3.- | MCP73831.2 135.03,53.34 135.48,52.88 135.48,51.21 | 131.83,47.55 135.48,51.21 | 155.45,51.51 157.28,51.51 160.17,54.41 | 160.17,54.41 162.15,56.39 165.05,56.39 165.05,55.32 R2-USB1.1 | 142.19,55.63 142.34,55.78 U4.9 | 142.19,55.63 141.73,55.17 141.28,55.17 U4.4 141.12,55.02 141.12,53.34 138.99,51.21 135.48,51.21 | U4.9 142.34,55.93 141.73,56.54 141.28,56.54 U4.1 141.12,56.69 137.16,56.69 | 142.19,55.63 143.1,55.63 U4.6 143.26,55.63 143.56,55.63 147.68,51.51 155.45,51.51 | 142.19,55.63 U4.9 | 137.16,56.69 C1_BAT.2 | 137.16,56.69 137.16,58.52 134.11,61.57 130.45,61.57 123.9,55.02 123.9,54.71 R2_BAT.1 | 167.03,7.01 C2.2 | 167.03,7.01 166.42,7.01 C.1.2 | 167.03,14.17 166.57,14.17 166.12,14.63 166.12,14.94 SENSOR2.7 | 167.03,14.17 167.49,14.63 167.49,14.94 SENSOR2.5 167.64,15.09 168.4,15.85 | 167.03,14.17 167.03,7.01 | 168.4,15.85 171.3,18.75 177.39,18.75 J3.1 | 139.14,40.84 139.14,41.91 138.53,42.52 C1_BAT1.2 | 139.14,40.84 138.68,40.39 126.19,40.39 123.75,42.82 123.75,43.43 | 123.75,43.43 123.75,43.89 124.66,44.81 126.34,44.81 127.56,46.02 128.63,46.02 128.93,45.72 128.93,45.11 128.17,44.35 IC4.2 | J2.MP3 174.8,46.94 178.46,46.94 J2.MP1 178.61,47.09 178.61,57.15 J2.MP2 178.46,57.15 174.8,57.15 J2.MP4 | 165.05,43.89 165.05,39.78 | 165.05,39.78 165.05,19.05 | 165.05,19.05 165.05,17.98 SENSOR2.1 | 165.05,43.89 163.22,45.72 163.22,46.94 C4_USB.2 163.22,47.09 163.22,48.16 C5_USB.2 | 165.05,43.89 168.1,46.94 174.65,46.94 J2.MP3 | 139.14,40.84 157.12,40.84 158.19,39.78 165.05,39.78
  Top 0.152: v167.34,16.92 168.4,15.85 | 165.05,19.05 v165.2,19.05 | 155.45,51.51 155.45,53.19 158.04,55.78 160.63,55.78 162.31,57.45 174.5,57.45 174.65,57.3 J2.MP4 | 123.75,43.43 v123.44,43.43 | 160.17,54.41 160.93,53.65 160.93,49.23 159.41,47.7 157.58,47.7 R2-USB.2 | J2.B12 J2.A1 174.09,46.96 J2.MP3 | J2.B1 J2.A12 174.09,57.18 J2.MP4
  Bottom 0.152: v56.84,107.75 63.86,107.75 v64.01,107.59 | v12.04,57.3 v14.02,55.32 v20.73,55.32 | v165.2,19.05 v167.34,16.92 | v122.22,43.28 123.29,43.28 v123.44,43.43 | v43.28,31.24 49.84,31.24 v65.53,15.54
GPIO8
  Top 0.152: R1.1 34.29,48.77 21.49,48.77 18.9,46.18 18.9,45.87 U2.10
I2C_PW  (via drill 0.35)
  Top 0.152: C2.1 167.64,5.79 166.42,5.79 C.1.1 166.27,5.79 165.35,5.79 R1-PINH.2 165.2,5.79 164.29,5.79 R2-PINH.2 164.13,5.79 163.53,6.4 163.53,13.41 165.05,14.94 SENSOR2.8 165.2,15.09 165.2,15.39 165.66,15.85 165.96,15.85 | 165.96,15.85 166.27,15.85 166.73,15.39 166.73,15.09 SENSOR2.6 | 165.96,15.85 165.96,17.22 | 165.96,17.22 165.96,17.83 SENSOR2.2 | v23.47,65.68 21.49,63.7 21.49,63.4 U2.17 | v46.48,65.68 52.43,65.68 57,70.26 87.48,70.26 92.35,65.38 101.65,65.38 121.31,45.72 122.53,45.72 122.83,45.41 122.83,43.13 148.74,17.22 165.96,17.22
  Bottom 0.152: v46.48,65.68 v23.47,65.68
INT_RTC  (via drill 0.35)
  Top 0.152: R1_PINH1.1 89.92,57.15 85.8,61.27 85.8,61.72 U3.3 85.65,61.87 85.65,62.79 81.23,67.21 81.23,69.19 81.08,69.34 80.16,69.34 v79.7,68.89 52.43,41.6 35.05,41.6 34.75,41.3 v33.83,41.3 | v17.07,42.98 16.46,43.59 16.46,45.72 U2.8 | v83.82,73 TP15.TP
  Bottom 0.152: v17.07,42.98 32.16,42.98 v33.83,41.3 | v79.7,68.89 v83.82,73
IO/BOOT
  Top 0.152: R_BOOT.1 22.4,108.36 24.69,108.36 24.84,108.2 BOOT_BUTTON.4 24.99,108.2 28.35,108.2 BOOT_BUTTON.3 28.5,108.2 28.65,108.36 31.7,108.36 C6.1 31.85,108.36 32.46,107.75 32.46,106.53 24.08,98.15 24.08,63.4 U2.15
IO/CHANGE  (via drill 0.35)
  Top 0.152: R_CHANGE.1 54.56,108.36 52.73,108.36 52.58,108.2 CHANGE_BUTTON.3 52.43,108.2 49.07,108.2 CHANGE_BUTTON.4 48.92,108.2 48.77,108.36 C10.1 | v13.87,70.41 13.87,63.4 U2.23 | v44.96,101.5 44.96,107.59 C10.1 | C10.1
  Bottom 0.152: v44.96,101.5 v13.87,70.41
MISO  (via drill 0.35)
  Top 0.152: v35.81,24.84 36.73,24.84 R8.1 | v35.81,31.24 36.73,32.16 D12.2 | v34.75,46.02 35.36,46.63 35.36,55.32 34.29,56.39 U1.2 | v8.84,62.03 8.84,63.25 U2.27 | v7.16,93.73 6.71,94.18 5.94,94.18 J4.P7 | v22.4,11.43 TP6.TP
  Bottom 0.152: v7.16,93.73 7.16,92.51 8.84,90.83 v8.84,62.03 8.84,53.65 16.46,46.02 v34.75,46.02 34.75,42.22 35.81,41.15 v35.81,31.24 v35.81,24.84 v22.4,11.43
MOSI  (via drill 0.35)
  Top 0.152: v83.21,12.5 84.28,13.56 84.28,14.02 J1.14 | TP7.TP v63.4,16.61 | v42.06,24.69 39.47,24.69 R7.1 | v42.06,43.89 42.06,53.95 U1.5 | v42.06,33.83 39.47,33.83 D11.2 | v16.15,47.24 15.09,46.18 15.09,45.87 U2.7 | v11.43,85.04 6.55,89.92 5.94,89.92 J4.P3
  Bottom 0.152: v83.21,12.5 67.51,12.5 v63.4,16.61 55.32,24.69 v42.06,24.69 v42.06,33.83 v42.06,43.89 39.32,46.63 34.44,46.63 33.83,47.24 v16.15,47.24 11.43,51.97 v11.43,85.04
N$1
  Top 0.152: IC1.5 53.49,92.35 57.45,88.39 62.18,88.39 C_DELAY.1 62.33,88.24 67.36,83.21 74.83,83.21 C1.1
N$2  (via drill 0.35)
  Top 0.152: v159.72,48.92 157.58,48.92 R2-USB.1 | v172.97,53.8 174.04,53.8 J2.B5
  Bottom 0.152: v159.72,48.92 168.1,48.92 v172.97,53.8
N$3
  Top 0.152: J1.5 88.85,14.17 88.85,18.44 90.07,19.66 EPD_C2.1
N$4
  Top 0.152: R2-USB1.2 165.2,53.95 170.38,53.95 173.43,50.9 174.04,50.9 J2.A5
N$5
  Top 0.152: CHG_LED.C 127.56,54.56 127.56,52.12 R1_BAT.1
N$6
  Top 0.152: 127.41,43.43 128.02,43.43 IC4.3 128.17,43.43 129.84,43.43 130.45,42.82 133.2,42.82 133.35,42.98 137.62,42.98 | 127.41,43.43 124.51,43.43 D2.1 | 127.41,43.43 127.41,44.81 127.86,45.26 128.02,45.26 IC4.1 | 137.62,42.98 137.62,44.65 139.29,46.33 139.29,49.68 Q1.2 | 137.62,42.98 137.62,42.06 138.38,41.3 C1_BAT1.1
N$7
  Top 0.152: C4.1 93.88,41.15 93.88,39.93 92.05,38.1 D3.2 91.9,38.1 91.9,34.29 D4.1
N$8
  Top 0.152: R1_BAT.2 126.49,51.97 126.49,50.75 128.93,48.31 130.61,48.31 134.57,52.27 MCP73831.1
N$9
  Top 0.152: R2_BAT.2 125.12,54.71 126.49,54.71 127.1,55.32 128.02,55.32 128.32,55.02 128.32,54.1 130,52.43 131.98,52.43 MCP73831.5
N$10
  Top 0.152: J1.4 89.46,14.17 89.46,17.68 EPD_C1.1
N$11
  Top 0.152: EPD_C6.1 83.82,19.51 82.45,18.14 82.45,14.17 J1.18
N$13
  Top 0.152: J1.19 81.84,14.17 81.84,18.75 82.75,19.66 EPD_C7.1
N$14
  Top 0.152: J1.20 81.38,14.17 81.38,19.66 EPD_C8.1
N$17
  Top 0.152: J1.22 80.31,14.17 80.31,18.14 78.79,19.66 EPD_C10.1
N$19
  Top 0.152: J1.24 79.25,14.17 77.88,14.17 EPD_C12.1
N$23
  Top 0.152: D7.1 85.8,64.77 81.99,68.58 R_CAPACITOR.2
PREVGH
  Top 0.152: J1.21 80.77,14.17 80.77,18.9 EPD_C9.1 80.01,19.81 80.47,20.27 81.84,20.27 81.99,20.42 81.99,21.34 82.3,21.64 82.45,21.64 89.92,29.11 89.92,35.05 83.06,41.91 D5.1
PREVGL
  Top 0.152: 74.68,19.66 73.76,19.66 EPD_C11.1 | 74.68,19.66 74.83,19.66 79.86,14.63 79.86,14.17 J1.23 | 74.68,19.66 88.39,33.38 88.39,34.29 D4.2
RESE
  Top 0.152: 73.76,12.19 70.56,8.99 R3.2 | 73.76,12.19 73.91,12.34 78.64,12.34 79.4,11.58 89.15,11.58 91.29,13.72 91.29,14.63 91.14,14.78 90.07,14.78 89.92,14.63 89.92,14.17 J1.3 | 73.76,12.19 69.34,16.61 Q3.2
RESE'
  Top 0.152: R2.2 66.75,12.65 66.75,10.21 SJ1.2 67.97,8.99 69.19,8.99 R3.1
RESET
  Top 0.152: C5.1 65.53,108.36 65.38,108.2 RESET_BUTTON.3 65.23,108.2 61.87,108.2 RESET_BUTTON.4 61.72,108.05 60.35,108.05 58.67,106.38 57.91,106.38 57.15,107.14 | 57.15,107.14 57.91,107.9 R_RESET.1 | 57.15,107.14 50.75,100.74 50.75,92.51 IC1.1 50.6,92.51 49.99,91.9 49.99,85.5 15.7,51.21 14.02,51.21 10.06,47.24 10.06,45.87 U2.3
RTC_RST  (via drill 0.35)
  Top 0.152: v22.1,58.52 22.55,58.98 22.55,63.25 U2.16 | v55.93,40.54 63.55,40.54 84.43,61.42 84.43,61.72 U3.4
  Bottom 0.152: v22.1,58.52 23.01,58.52 34.59,46.94 49.53,46.94 v55.93,40.54
RX
  Top 0.152: U2.24 12.65,63.4 12.65,70.71 13.87,71.93 TP2.TP
SCK  (via drill 0.35)
  Top 0.152: v84.43,15.09 84.73,14.78 84.73,14.17 J1.13 | TP8.TP v62.64,22.86 64.92,25.15 64.92,27.43 63.09,29.26 62.18,29.26 57.76,24.84 43.28,24.84 R6.1 | U1.6 42.06,55.17 42.82,54.41 v42.82,43.28 41.76,43.28 40.54,44.5 v34.14,44.5 | v42.82,34.9 43.13,34.59 43.13,33.83 D10.2 | v14.78,44.5 13.87,45.41 13.87,45.72 U2.6 | v7.16,91.59 6.71,92.05 5.94,92.05 J4.P5
  Bottom 0.152: v84.43,15.09 70.41,15.09 v62.64,22.86 46.63,38.86 | v42.82,43.28 42.82,42.67 46.63,38.86 | v42.82,34.9 46.63,38.71 46.63,38.86 | v34.14,44.5 v14.78,44.5 14.78,45.57 7.16,53.19 v7.16,91.59
SCL  (via drill 0.35)
  Top 0.152: 144.78,56.08 160.48,56.08 162.92,58.52 179.68,58.52 179.83,58.37 179.83,24.23 177.7,22.1 | 144.78,56.08 143.26,56.08 U4.7 | 177.7,22.1 177.55,21.95 J3.4 177.7,22.1 | 173.74,11.89 178.46,16.61 178.46,21.34 177.7,22.1 | 173.74,11.89 168.25,6.4 164.74,6.4 164.29,6.86 R2-PINH.1 | v168.55,16.92 167.64,17.83 SENSOR2.4 | 173.74,11.89 v173.58,11.89 | v18.9,64.92 17.68,63.7 17.68,63.4 U2.20 | v45.72,64.92 52.12,64.92 57.15,69.95 87.33,69.95 92.2,65.08 97.99,65.08 99.97,63.09 v99.97,57.3 99.97,55.93 96.93,52.88 88.7,52.88 88.39,52.58 U3.16 | 144.78,56.08 144.78,57 144.47,57.3 v138.07,57.3
  Bottom 0.152: v173.58,11.89 v168.55,16.92 | v45.72,64.92 v18.9,64.92 | v99.97,57.3 v138.07,57.3
SDA  (via drill 0.35)
  Top 0.152: v18.9,62.03 18.9,63.25 U2.19 | v48.77,62.03 v42.82,62.03 | v85.8,54.1 86.87,53.03 86.87,52.58 U3.15 | v144.17,56.69 143.26,56.69 U4.8 | 166.73,31.85 166.73,17.98 SENSOR2.3 | 166.73,31.85 v166.73,34.14 | v165.2,13.87 165.2,7.01 R1-PINH.1 | 166.73,31.85 169.32,31.85 170.23,30.94 170.23,27.74 177.09,20.88 177.39,20.88 J3.3
  Bottom 0.152: v42.82,62.03 v18.9,62.03 | v48.77,62.03 77.88,62.03 v85.8,54.1 108.2,54.1 121.16,41.15 132.74,41.15 146.15,54.56 146.15,54.71 | 146.15,54.71 v166.73,34.14 164.59,32 164.59,18.75 165.2,18.14 v165.2,13.87 | 146.15,54.71 v144.17,56.69
SRC  (via drill 0.35)
  Top 0.152: C4.2 93.88,42.52 85.5,42.52 85.5,41.91 v85.09,41.91 | Q3.3 68.58,25.45 74.68,31.55 76.2,31.55 76.66,31.09 77.88,31.09 78.33,31.55 78.33,36.27 81.23,39.17 | 81.23,39.17 81.15,39.24 | 81.15,39.24 79.55,40.84 79.55,41.91 D5.2 | 81.23,39.17 L1.1 | v76.2,39.37 81.15,39.37 81.15,39.24
  Bottom 0.152: v85.09,41.91 85.09,40.64 74.93,40.64 74.93,39.37 v76.2,39.37
SS_SD  (via drill 0.35)
  Top 0.152: D8.2 16.46,102.26 11.43,102.26 R10.1 v11.43,98.91 | v11.12,47.4 11.12,45.87 U2.4 | v6.55,86.72 6.55,87.02 6.86,87.33 6.86,88.24 6.25,88.85 J4.P2
  Bottom 0.152: v11.12,47.4 11.12,48.77 6.55,53.34 v6.55,86.72 6.55,94.03 v11.43,98.91
TX
  Top 0.152: U2.25 11.28,63.4 11.28,72.08 11.43,72.24 TP1.TP
USB_D+  (via drill 0.35)
  Top 0.152: v143.71,50.75 156.97,50.75 159.11,52.88 160.02,52.88 D1.1 | v54.1,45.11 45.57,45.11 43.13,42.67 27.13,42.67 24.08,45.72 U2.14
  Bottom 0.152: v143.71,50.75 142.8,50.75 132.89,40.84 88.09,40.84 83.82,45.11 v54.1,45.11
USB_D-  (via drill 0.35)
  Top 0.152: v158.34,51.21 160.02,51.21 D1.3 | v75.13,66.14 53.8,66.14 43.43,55.78 41.45,55.78 40.08,54.41 40.08,49.99 35.2,45.11 26.36,45.11 24.54,46.94 23.47,46.94 22.71,46.18 22.71,45.87 U2.13
  Bottom 0.152: v158.34,51.21 151.03,51.21 136.25,65.99 75.29,65.99 v75.13,66.14
VBAT
  Top 0.152: U4.2 141.28,56.08 141.28,55.63 U4.3 141.12,55.63 140.82,55.63 138.53,53.34 138.53,51.97 Q1.3 138.38,51.97 137.31,51.97 135.03,54.25 134.72,54.25 MCP73831.3 | 134.26,54.25 133.81,53.8 133.81,52.88 129.84,48.92 C2_BAT.1 | 134.26,54.25 134.57,54.25 MCP73831.3 | TP3.TP 133.35,55.17 134.26,54.25 | 134.26,54.25 MCP73831.3
VBUS
  Top 0.152: R1_PWRUSB.2 121.92,46.33 122.38,46.33 123.14,45.57 124.36,45.57 D2.2 124.51,45.57 124.51,46.33 | 131.83,54.56 129.08,54.56 CHG_LED.A 129.08,54.71 128.17,55.63 124.97,55.63 124.51,55.17 124.51,46.33 | 131.83,54.56 131.98,54.41 MCP73831.4 131.83,54.56 | 131.83,54.56 131.83,60.35 132.74,61.27 133.96,61.27 134.72,60.5 134.72,57.76 137.16,55.32 C1_BAT.1 | 161.7,48.31 161.7,47.24 161.85,47.09 C4_USB.1 162,46.94 162,43.43 | 161.7,48.31 161.7,51.51 162.15,51.97 162.46,51.97 D1.5 | 124.51,46.33 128.78,46.33 131.06,44.04 132.74,44.04 133.35,43.43 135.94,43.43 137.47,44.96 137.47,49.68 Q1.1 137.62,49.84 138.23,49.84 138.99,50.6 142.95,50.6 146.46,47.09 153.62,47.09 TP14.TP 156.79,43.87 156.79,41.15 158.75,41.15 158.75,41.91 158.95,41.91 160.48,43.43 162,43.43 | 161.7,48.31 161.85,48.31 C5_USB.1 | 162,43.43 162.15,43.28 PFMF.050.1.2 162,43.43
VRTC
  Top 0.152: C8.1 96.77,49.53 96.62,49.68 C10_SUPERCAP.2 96.47,49.84 87.94,49.84 85.8,51.97 85.8,52.43 U3.14 85.65,52.58 85.19,53.03 85.19,62.79 80.77,67.21 80.77,68.58 R_CAPACITOR.1
VUSB  (via drill 0.35)
  Top 0.152: J2.A9 J2.B4 J2.B9 J2.A4 v171.45,49.52 v171.45,49.53 | v160.02,45.72 157.48,45.72 157.48,43.18 PFMF.050.1.1
  Bottom 0.152: v171.45,49.53 171.45,45.72 v160.02,45.72